# Altium PCB Board.PcbDoc
Units mm, origin at the board's own origin, x right, y up, seen from the top; angles counter-clockwise.
Board outline 30 x 50.95 mm, 4 copper layers (TopLayer, InternalPlane1, InternalPlane2, BottomLayer); 1 components, 27 nets, 54 pads, 0 vias.
Unrouted connection lines stored in the file: 19.
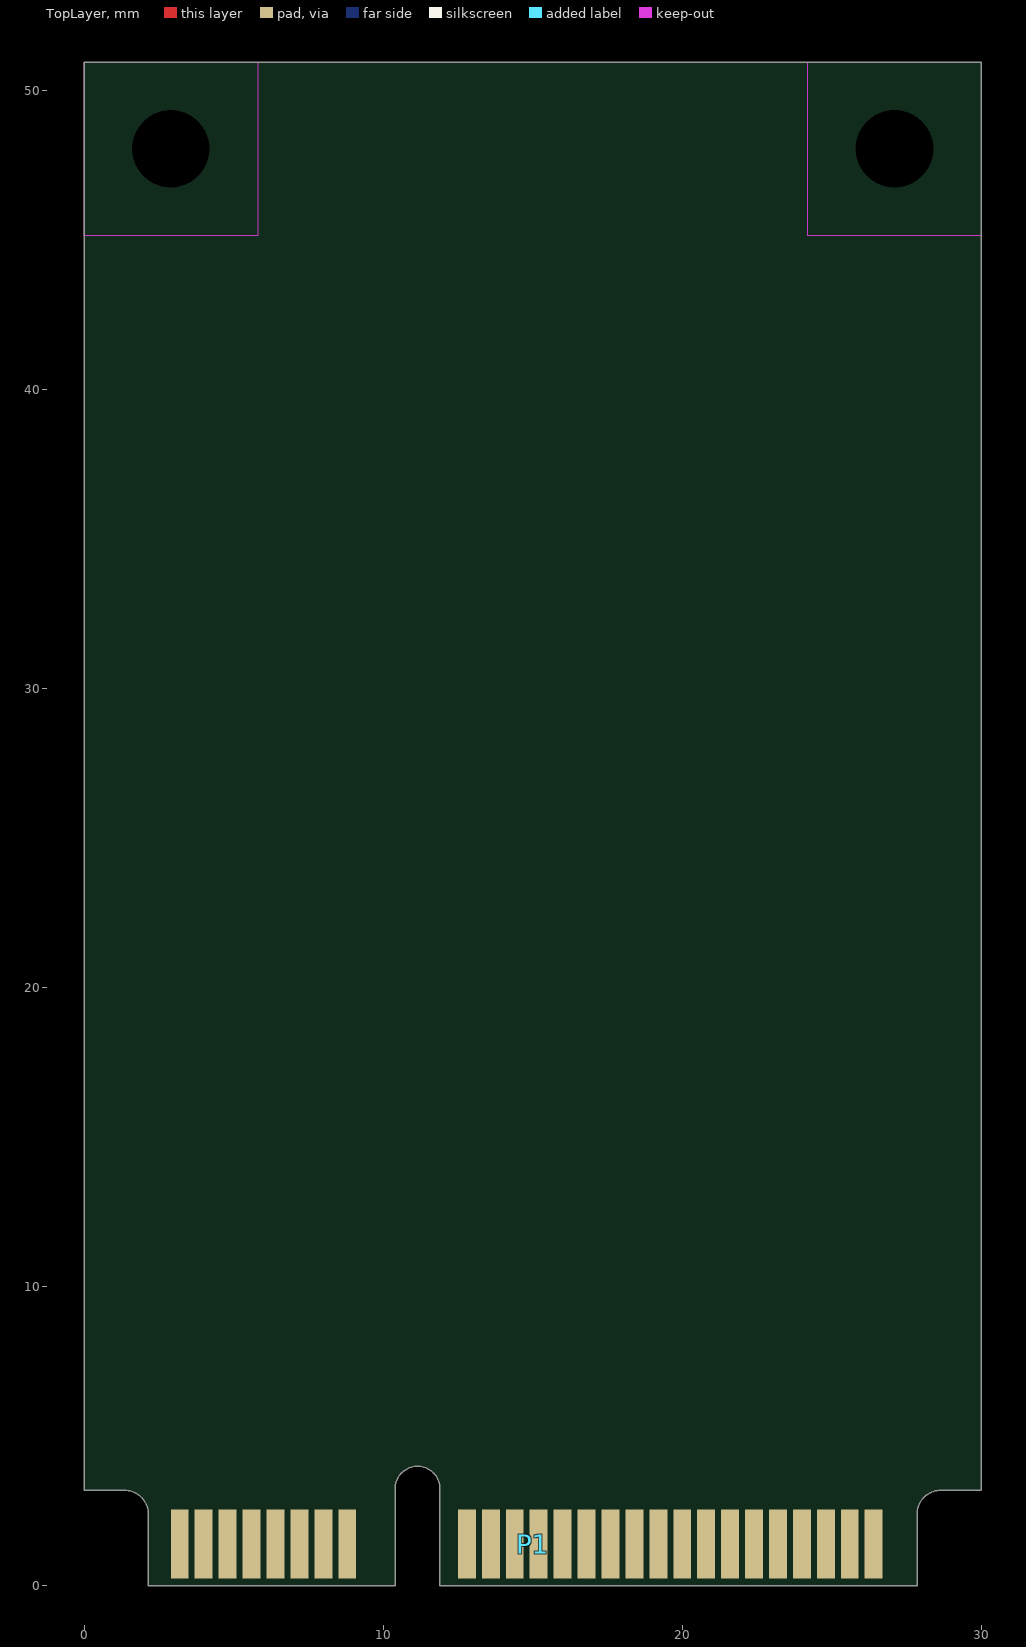
[diagram p0: TopLayer view]
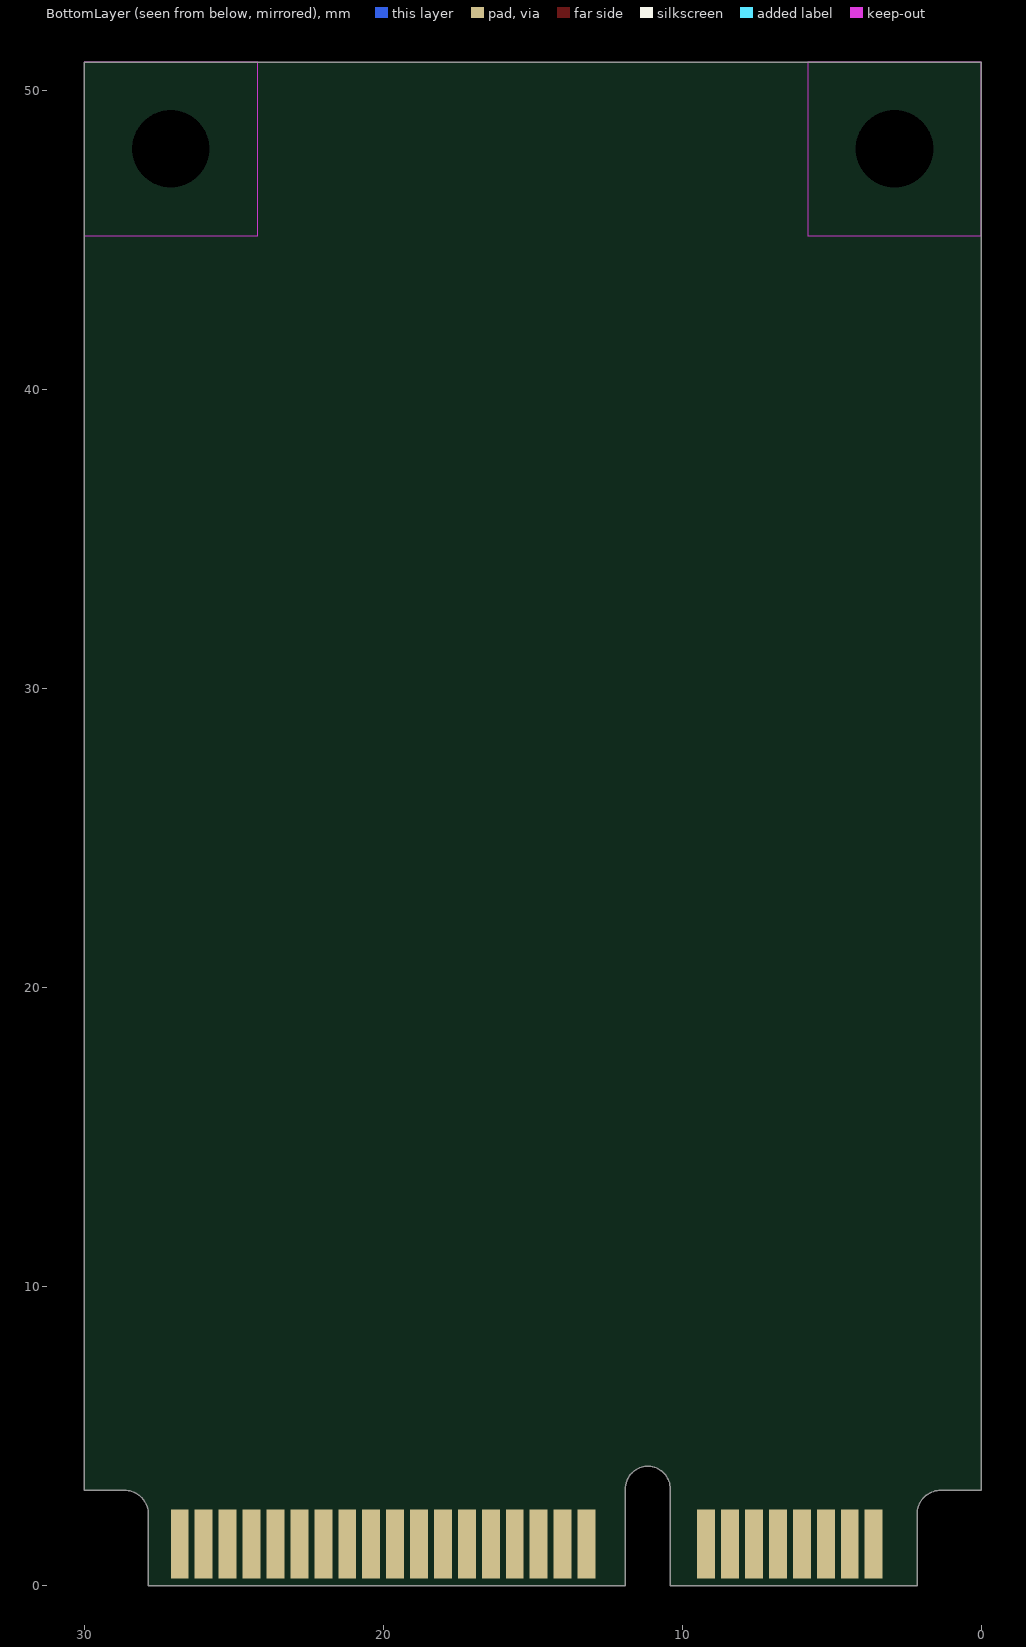
[diagram p1: BottomLayer view, seen from below]
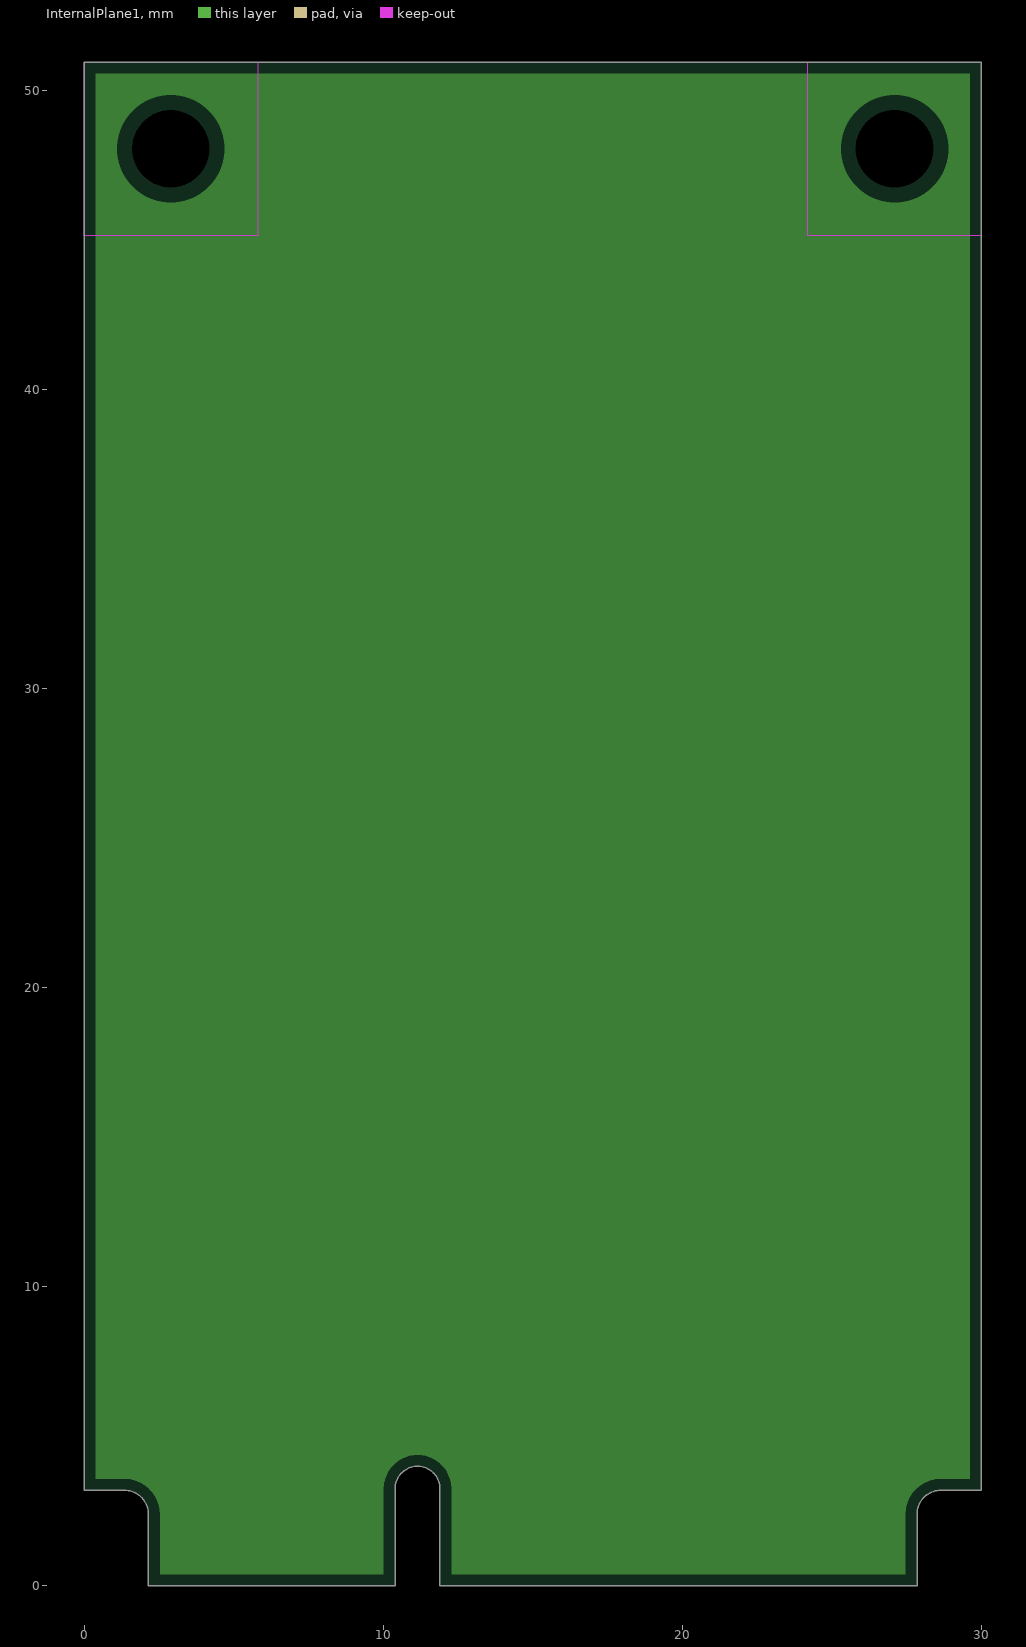
[diagram p2: InternalPlane1, clearances drawn from the general rule]
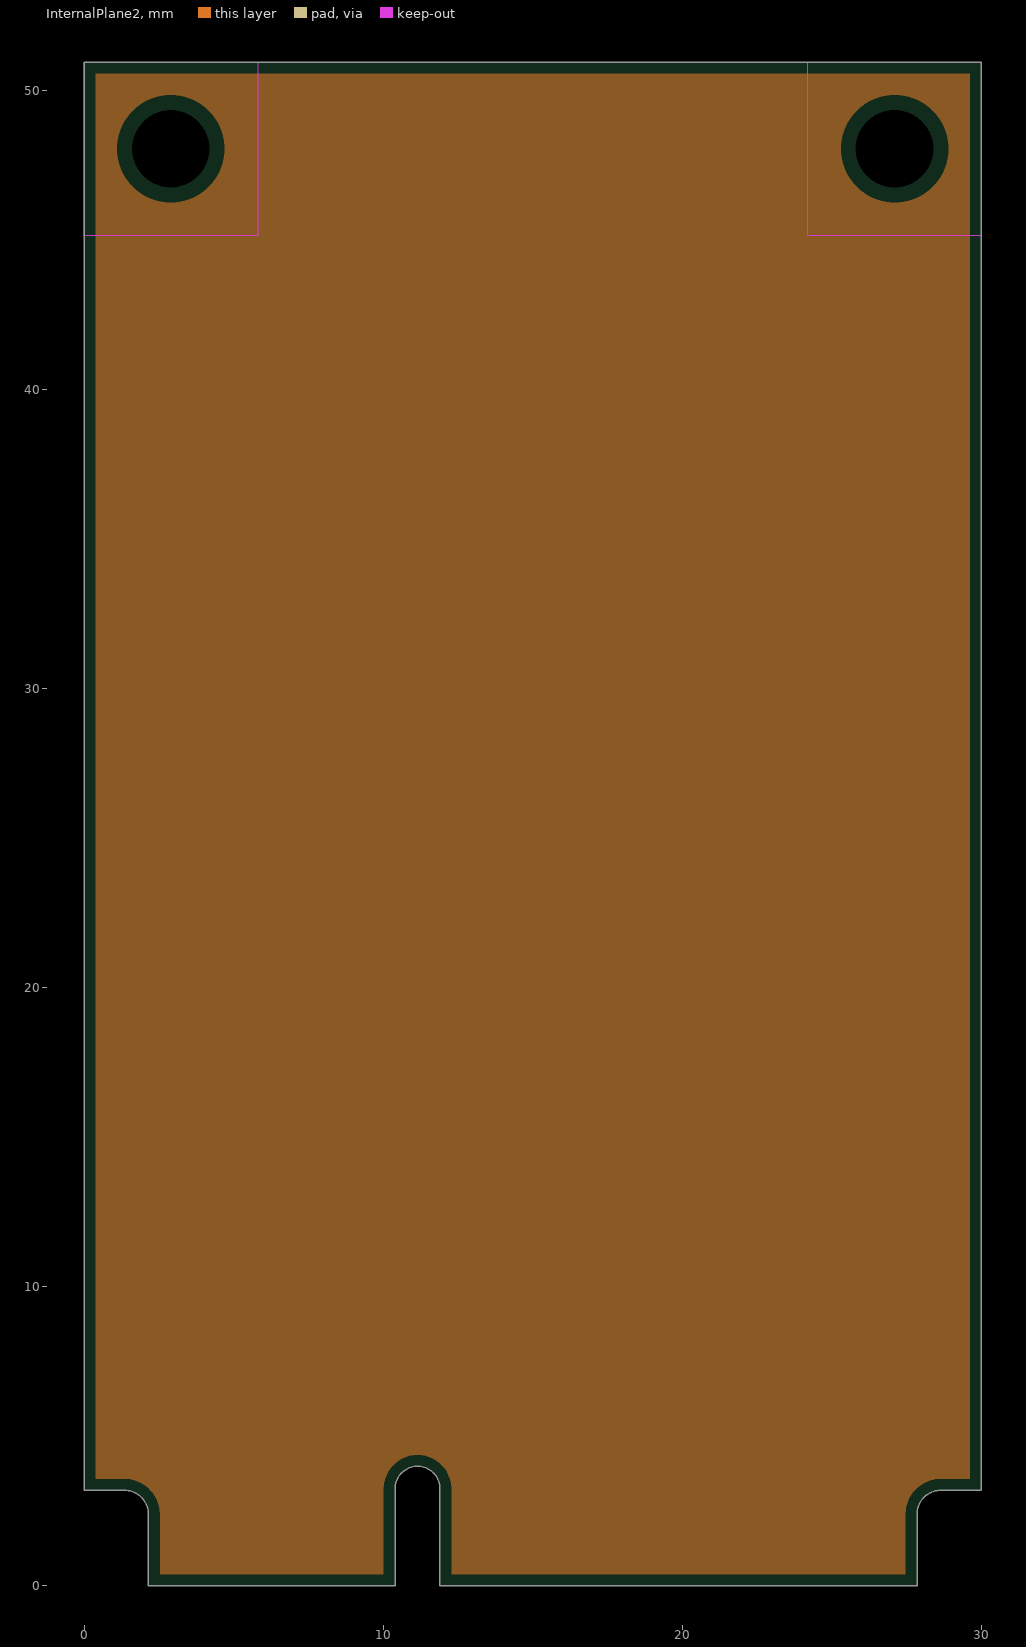
[diagram p3: InternalPlane2, clearances drawn from the general rule]

## Layer stack, top to bottom
TopSolder: solder mask 0.0102, Solder Resist, Dk 3.5
TopLayer: signal copper 0.0178
Dielectric1: core 0.32, FR-4, Dk 4.8
InternalPlane1: plane copper 0.0356
Dielectric2: prepreg 0.32, FR-4, Dk 4.8
InternalPlane2: plane copper 0.0356
Dielectric3: core 0.32, FR-4, Dk 4.8
BottomLayer: signal copper 0.0178
BottomSolder: solder mask 0.0102, Solder Resist, Dk 3.5

## Board outline
2.15,2.4 ccw(c1.35,2.4) 1.35,3.2 0,3.2 0,50.95 30,50.95 30,3.2 28.65,3.2 ccw(c28.65,2.4) 27.85,2.4 27.85,0 11.9,0 11.9,3.25 ccw(c11.15,3.25) 10.4,3.25 10.4,0 2.15,0

## Design rules (kind name [scope] priority, off if disabled: settings)
Clearance "Clearance_Edge Connector" [(InComponentClass('Edge Connector')) vs (InComponentClass('Edge Connector'))] p1: gap=0.2 ignorepadtopadclearanceinfootprint=FALSE except(0: Arc-Hole Track-Hole SMDPad-Hole THPad-Hole Via-Hole Fill-Hole Poly-Hole Region-Hole Text-Hole)
Clearance [All] p2: gap=0.254 ignorepadtopadclearanceinfootprint=FALSE except(0: Arc-Hole Track-Hole SMDPad-Hole THPad-Hole Via-Hole Fill-Hole Poly-Hole Region-Hole Text-Hole)
DiffPairsRouting [All] p1: maxlimit=0.254 minlimit=0.254 mostfreqgap=0.254 toplayer_minwidth=0.381 toplayer_maxwidth=0.381 toplayer_prefwidth=0.381 bottomlayer_minwidth=0.381 bottomlayer_maxwidth=0.381 bottomlayer_prefwidth=0.381 maxuncoupledlength=12.7
FabricationTestPointUsage TestPointUsage [All] p1: valid=0 allowmultiple=FALSE
FabricationTestpoint Testpoint [All] p1: side=3 testpointundercomponent=TRUE minsize=1.016 maxsize=2.54 preferedsize=1.524 minholesize=0.508 maxholesize=1.016 preferedholesize=0.813 testpointgrid=0.025 allowsidetop=TRUE allowsidebottom=TRUE usegrid=TRUE gridtolerance=0
Height "PCI Express Mini, \"Component height constraints\", Page 18, bottom side" [OnBottomLayer] p1: minheight=0 maxheight=1.35 prefheight=1.35
Height "PCI Express Mini, \"Component height constraints\", Page 18, top side" [OnTopLayer] p2: minheight=0 maxheight=2.4 prefheight=2.4
PlaneClearance [All] p1: clearance=0.5
PlaneConnect [All] p1: planeconnectstyle=Relief reliefexpansion=0.508 reliefentries=4 reliefconductorwidth=0.254 reliefairgap=0.254
PolygonConnect [All] p1: connectstyle=Relief reliefconductorwidth=0.254 reliefentries=4 polygonreliefangle="90 Angle" airgapwidth=0.254
RoomDefinition "Component keep out area bottom" [Not (InComponentClass('Edge Connector'))] p1: confinementstyle=ConfineOut formatcopy=TRUE lockcomponents=FALSE outline 0,5.1 30,5.1 30,3.138 28.65,3.138 28.321,3.064 28.092,2.915 27.915,2.666 27.85,2.354 27.85,0 2.15,0 2.15,2.354 2.083,2.69 1.956,2.89 1.626,3.089 1.35,3.138 0,3.138
RoomDefinition "Component keep out area top" [Not (InComponentClass('Edge Connector'))] p2: confinementstyle=ConfineOut formatcopy=TRUE lockcomponents=FALSE outline 1.35,3.2 1.4,3.25 10.2,3.25 10.2,4.2 12.1,4.2 12.1,3.25 12.15,3.2 28.45,3.2 ccw(c28.45,2.888) 28.229,3.109 28.016,2.896 ccw(c28.417,2.494) 27.85,2.494 27.85,0 2.15,0 2.15,2.513 ccw(c1.574,2.513) 1.981,2.921 1.814,3.088 ccw(c1.727,3.002) 1.727,3.124 ccw(c1.544,2.941) 1.544,3.2
RoutingVias [All] p1: holewidth=0.711 width=1.27 viastyle="Through Hole" minholewidth=0.711 minwidth=1.27 maxholewidth=0.711 maxwidth=1.27
SilkToSolderMaskClearance SilkscreenOverComponentPads [IsPad] p1: minsilkscreentomaskgap=0.254 clearancetoexposedcopper=TRUE
SolderMaskExpansion [HasPad('J2-M2')] p1: expansion=0
Width [All] p1: maxlimit=0.254 minlimit=0.254 preferedwidth=0.254
23 further rules are at their usual default settings.

## Classes and differential pairs
differential pair USB_D: +USB_D_P -USB_D_N
differential pair REFCLK: +REFCLK_P -REFCLK_N
differential pair PET0: +PET0_P -PET0_N
differential pair PER0: +PER0_P -PER0_N

## Components (designator, comment, footprint, x,y, rotation, side; value= is the part's Value field where it differs from the comment)
P1 "PCIeMini-CN-2S-M-R52" PCIeMini-GF-2D-800-1K-S52 15,1.4 r0 top locked

## Footprints (in the part's own frame and the unit in brackets; to place one, negate y for a bottom-side part, rotate by r counter-clockwise, add the part's x,y. Pads: shape width x height; smd on the part's side, far side on the other; paste and mask are expansions set on the pad)
PCIeMini-GF-2D-800-1K-S52 [mm] "Golden finger, PCIeMini, Dual, Staggered, Pitch 0.8mm, 52-Position"
  rect 0.6x2.3 smd paste-0.9: 1(-11.8,0) 3(-11,0) 5(-10.2,0) 7(-9.4,0) 9(-8.6,0) 11(-7.8,0) 13(-7,0) 15(-6.2,0) 17(-2.2,0) 19(-1.4,0) 21(-0.6,0) 23(0.2,0) 25(1,0) 27(1.8,0) 29(2.6,0) 31(3.4,0) 33(4.2,0) 35(5,0) 37(5.8,0) 39(6.6,0) 41(7.4,0) 43(8.2,0) 45(9,0) 47(9.8,0) 49(10.6,0) 51(11.4,0)
  rect 0.6x2.3 smd far side paste-0.9: 2(-11.4,0) 4(-10.6,0) 6(-9.8,0) 8(-9,0) 10(-8.2,0) 12(-7.4,0) 14(-6.6,0) 16(-5.8,0) 18(-1.8,0) 20(-1,0) 22(-0.2,0) 24(0.6,0) 26(1.4,0) 28(2.2,0) 30(3,0) 32(3.8,0) 34(4.6,0) 36(5.4,0) 38(6.2,0) 40(7,0) 42(7.8,0) 44(8.6,0) 46(9.4,0) 48(10.2,0) 50(11,0) 52(11.8,0)

## Part data
P1: library part CMP-0001-00067-2, "Golden finger, PCIeMini, Dual, Staggered, Pitch 0.8mm, 52-Position"

## Free pads (board coordinates)
  round 2.3 hole 2.6 unplated: MH1(2.9,48.05) MH2(27.1,48.05)

## Nets (pads, with @x,y where several pads share a name; then routed paths per layer and width w, separated by ;. In a path a pad name is that pad's centre, name@x,y a point inside that pad or via, vN(x,y) a via of type N, cw(c..) or ccw(c..) an arc to the next point about the centre after c; other vN are vias at no path point)
+1.5V: P1.6 P1.28 P1.48
+3.3VAUX: P1.2 P1.24 P1.39 P1.41 P1.52
CLKREQ#: P1.7
COEX1: P1.3
COEX2: P1.5
GND: P1.4 P1.9 P1.15 P1.18 P1.21 P1.26 P1.27 P1.29 P1.34 P1.35 P1.37 P1.40 P1.43 P1.50
LED_WLAN#: P1.44
LED_WPAN#: P1.46
LED_WWAN#: P1.42
PER0_N: P1.23
PER0_P: P1.25
PERST#: P1.22
PET0_N: P1.31
PET0_P: P1.33
REFCLK_N: P1.11
REFCLK_P: P1.13
SMB_CLK: P1.30
SMB_DATA: P1.32
UIM_CLK: P1.12
UIM_DATA: P1.10
UIM_PWR: P1.8
UIM_RESET: P1.14
UIM_VPP: P1.16
USB_D_N: P1.36
USB_D_P: P1.38
W_DISABLE#: P1.20
WAKE#: P1.1
pads on no net: P1.17 P1.19 P1.45 P1.47 P1.49 P1.51

## Polygon pours and split planes (outlines as drawn)
no net on InternalPlane1 (split plane): 29.617,3.583 28.65,3.583 28.65,3.584 28.496,3.573 28.344,3.543 28.197,3.493 28.058,3.425 27.93,3.339 27.813,3.237 27.711,3.12 27.625,2.992 27.557,2.853 27.507,2.706 27.477,2.554 27.466,2.4 27.467,2.4 27.467,0.383 12.283,0.383 12.283,3.25 12.274,3.398 12.245,3.543 12.197,3.684 12.132,3.817 12.049,3.94 11.951,4.051 11.84,4.149 11.717,4.232 11.584,4.297 11.443,4.345 11.298,4.374 11.15,4.383 11.002,4.374 10.857,4.345 10.716,4.297 10.583,4.232 10.46,4.149 10.349,4.051 10.251,3.94 10.168,3.817 10.103,3.684 10.055,3.543 10.026,3.398 10.017,3.25 10.017,0.383 2.533,0.383 2.533,2.4 2.534,2.4 2.523,2.554 2.493,2.706 2.443,2.853 2.375,2.992 2.289,3.12 2.187,3.237 2.07,3.339 1.942,3.425 1.803,3.493 1.656,3.543 1.504,3.573 1.35,3.584 1.35,3.583 0.383,3.583 0.383,50.567 29.617,50.567
no net on InternalPlane2 (split plane): 29.617,3.583 28.65,3.583 28.65,3.584 28.496,3.573 28.344,3.543 28.197,3.493 28.058,3.425 27.93,3.339 27.813,3.237 27.711,3.12 27.625,2.992 27.557,2.853 27.507,2.706 27.477,2.554 27.466,2.4 27.467,2.4 27.467,0.383 12.283,0.383 12.283,3.25 12.274,3.398 12.245,3.543 12.197,3.684 12.132,3.817 12.049,3.94 11.951,4.051 11.84,4.149 11.717,4.232 11.584,4.297 11.443,4.345 11.298,4.374 11.15,4.383 11.002,4.374 10.857,4.345 10.716,4.297 10.583,4.232 10.46,4.149 10.349,4.051 10.251,3.94 10.168,3.817 10.103,3.684 10.055,3.543 10.026,3.398 10.017,3.25 10.017,0.383 2.533,0.383 2.533,2.4 2.534,2.4 2.523,2.554 2.493,2.706 2.443,2.853 2.375,2.992 2.289,3.12 2.187,3.237 2.07,3.339 1.942,3.425 1.803,3.493 1.656,3.543 1.504,3.573 1.35,3.584 1.35,3.583 0.383,3.583 0.383,50.567 29.617,50.567

## Keep-outs
KeepOutLayer:
  region: 5.8,45.15 0,45.15 0,50.95 5.8,50.95 hole: 2.9,49.361 2.561,49.317 2.244,49.186 1.973,48.977 1.764,48.706 1.633,48.389 1.589,48.05 1.633,47.711 1.764,47.394 1.973,47.123 2.244,46.914 2.561,46.783 2.9,46.739 3.239,46.783 3.556,46.914 3.827,47.123 4.036,47.394 4.167,47.711 4.211,48.05 4.167,48.389 4.036,48.706 3.827,48.977 3.556,49.186 3.239,49.317
  region: 24.2,45.15 24.2,50.95 30,50.95 30,45.15 hole: 28.411,48.05 28.367,48.389 28.236,48.706 28.027,48.977 27.756,49.186 27.439,49.317 27.1,49.361 26.761,49.317 26.444,49.186 26.173,48.977 25.964,48.706 25.833,48.389 25.789,48.05 25.833,47.711 25.964,47.394 26.173,47.123 26.444,46.914 26.761,46.783 27.1,46.739 27.439,46.783 27.756,46.914 28.027,47.123 28.236,47.394 28.367,47.711

## Silkscreen, mask and mechanical layers (free items; w line width, h text height)
PCI-SIG Outline:
  the board outline again, w0.1